# EAGLE board schematic (EAGLE 4.16)
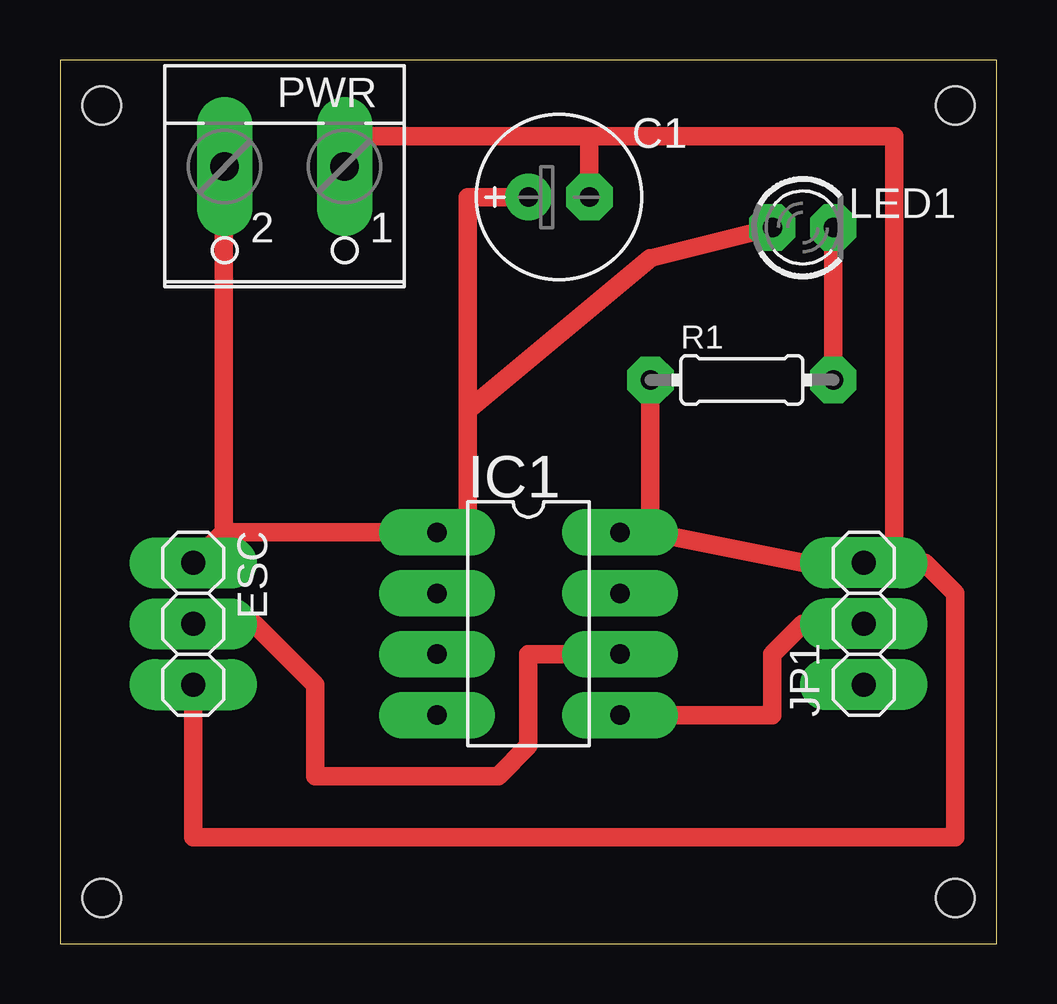
[diagram p0: board, top side]

Size 39.04 x 36.82 mm. Coordinates in mm from the lower left corner, seen from the top.
Outline: 0,0 39.04,0 39.04,36.82 0,36.82 0,0
Copper layers 1: Top 0.035mm
Design rules "pcb-gcode": minimum track width 30mil, minimum drill 22mil, track to track 20mil, track to pad 20mil, pad to pad 10mil, via to via 8mil, smd to smd 8mil, copper to edge 40mil, drill to drill 30mil, minimum pad ring 22mil, minimum via ring 30mil, stop-mask expansion 4mil, vias tented up to drill 0mil, thermal gap 10mil
Holes 1.6 mm at 37.3,34.92 37.3,1.9 1.74,1.9 1.74,34.92

## Footprints (pad centres in the part's own frame; a part is rotated, then mirrored left to right if it is on the bottom)
E2,5-7 = drill 0.813 pad 1.6 round: + -1.27,0 | drill 0.813 pad 1.6 octagon: - 1.27,0
1X03 = drill 1.016 long: 1 -2.54,0; 2 0,0; 3 2.54,0
DIL8 = drill 0.813 long: 1 -3.81,-3.81; 2 -1.27,-3.81; 3 1.27,-3.81; 4 3.81,-3.81; 5 3.81,3.81; 6 1.27,3.81; 7 -1.27,3.81; 8 -3.81,3.81
LED3MM = drill 0.813 octagon: A -1.27,0; K 1.27,0
W237-102 = drill 1.194 long: 1 -2.5,-1.27; 2 2.5,-1.27
0204/7 = drill 0.813 octagon: 1 -3.81,0; 2 3.81,0

## Placement (x,y rotation side)
C1  10u  [E2,5-7]  20.79,31.11 0 top
ESC  [1X03]  5.55,13.33 270 top
IC1  PIC12F629P  [DIL8]  19.52,13.33 270 top
JP1  [1X03]  33.49,13.33 90 top
LED1  [LED3MM]  30.95,29.84 0 top
PWR  [W237-102]  9.36,31.11 180 top
R1  [0204/7]  28.41,23.49 0 top

## Library data of the parts
C1 R1 = rcl
ESC JP1 = pinhead
IC1 = microchip
LED1 = led
PWR = con-wago-500

## Nets
B$1: C1.+ ESC.1 IC1.1 LED1.A PWR.2
B$2: C1.- ESC.3 IC1.8 JP1.3 PWR.1 R1.1
N$1: LED1.K R1.2
N$2: IC1.5 JP1.2
N$4: ESC.2 IC1.6
POT: JP1.1

## Tracks (layer width: path | path; a pad name or v marks a point on that pad's centre or on a via)
B$1
  Top 0.762: ESC.1 6.82,17.14 | C1.+ 16.98,31.11 16.98,22.22 | 16.98,22.22 16.98,17.14 IC1.1 6.82,17.14 | LED1.A 24.6,28.57 16.98,22.22 | 6.82,17.14 6.82,29.84 PWR.2
B$2
  Top 0.762: 22.06,33.65 C1.- | 22.06,33.65 11.9,33.65 PWR.1 | 24.6,17.14 R1.1 | ESC.3 5.55,4.44 37.3,4.44 37.3,14.6 36.03,15.87 34.76,15.87 | 24.6,17.14 30.95,15.87 JP1.3 34.76,15.87 | 24.6,17.14 IC1.8 | 22.06,33.65 34.76,33.65 34.76,15.87
N$1
  Top 0.762: R1.2 LED1.K
N$2
  Top 0.762: IC1.5 29.68,9.52 29.68,12.06 30.95,13.33 JP1.2
N$4
  Top 0.762: IC1.6 19.52,12.06 19.52,8.25 18.25,6.98 10.63,6.98 10.63,10.79 8.09,13.33 ESC.2